# Altium PCB LM_001_Rev_C.PcbDoc (part 1 of 2)
Units mm, origin at the board's own origin, x right, y up, seen from the top; angles counter-clockwise.
Board outline 67 x 180 mm, 4 copper layers (Top Layer, +5V, Signal Layer 1, Bottom Layer), stack 0.778 mm thick; 103 components, 93 nets, 340 pads, 85 vias.
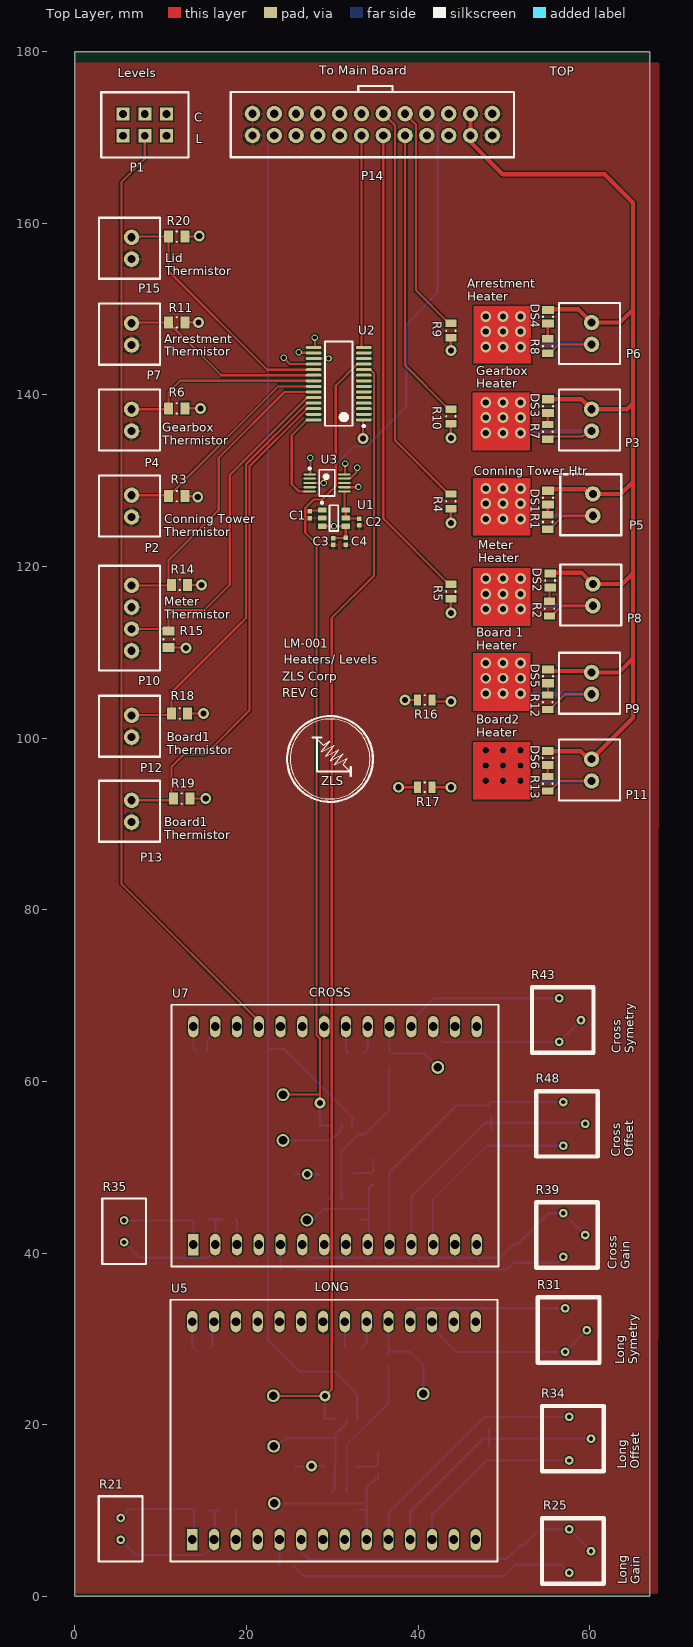
[diagram p0: Top Layer view]
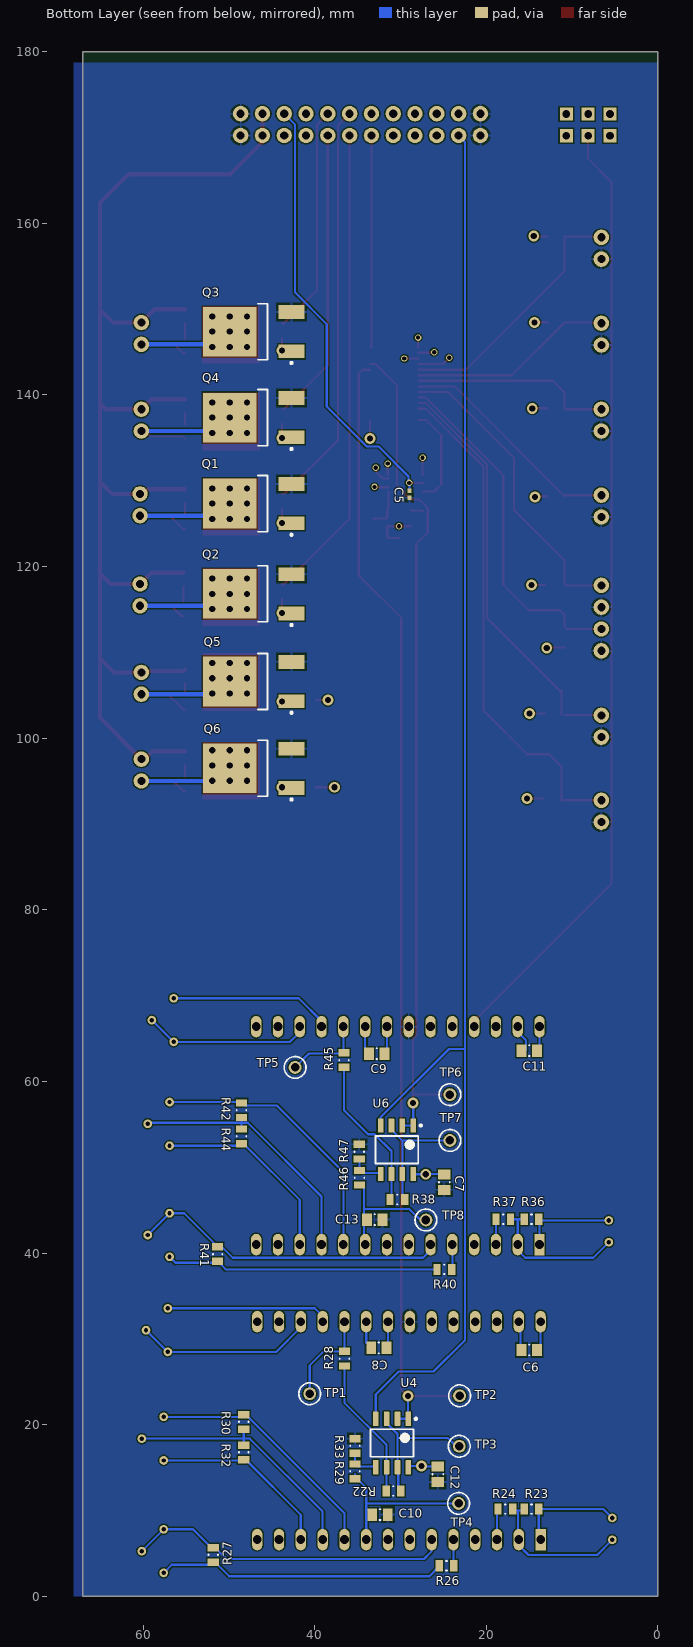
[diagram p1: Bottom Layer view, seen from below]
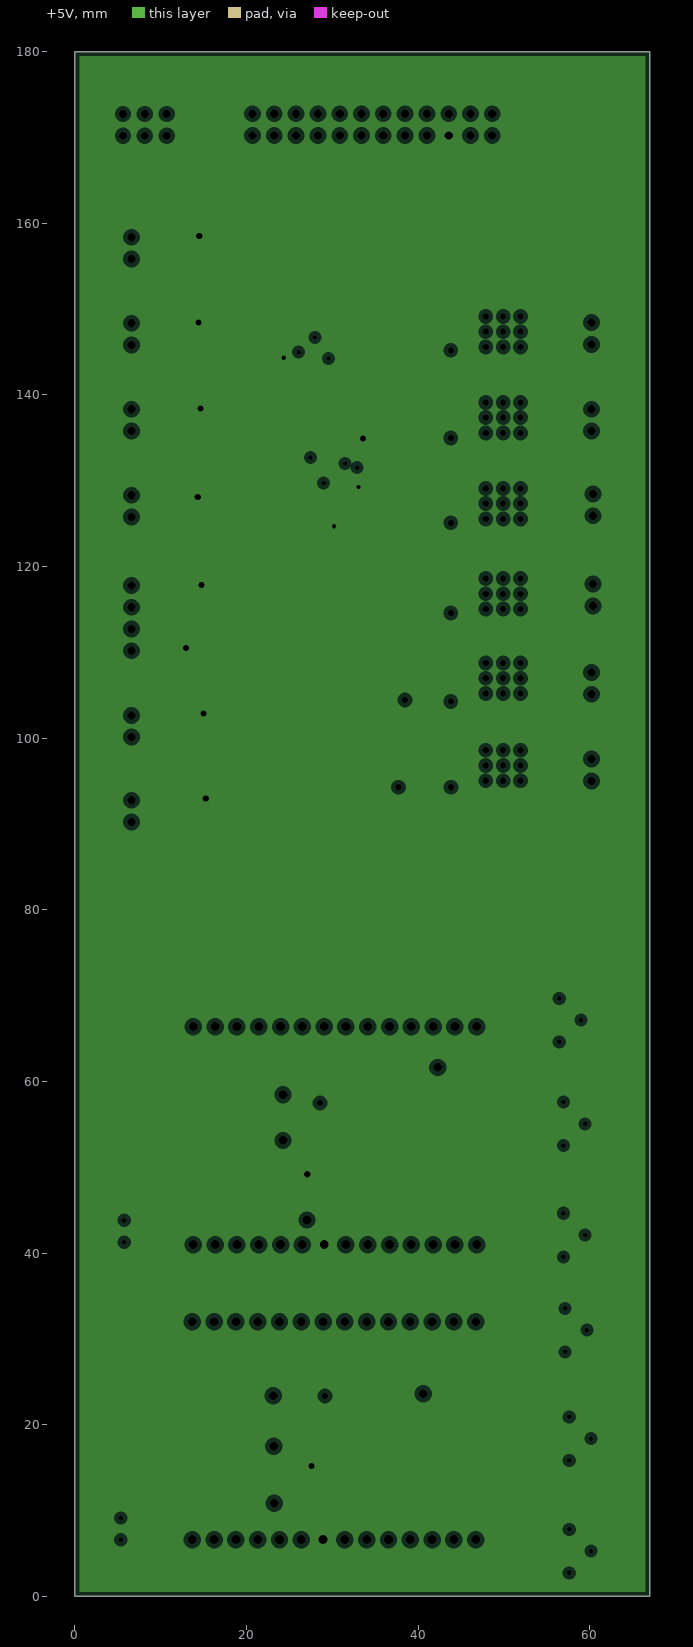
[diagram p2: +5V, clearances drawn from the general rule]
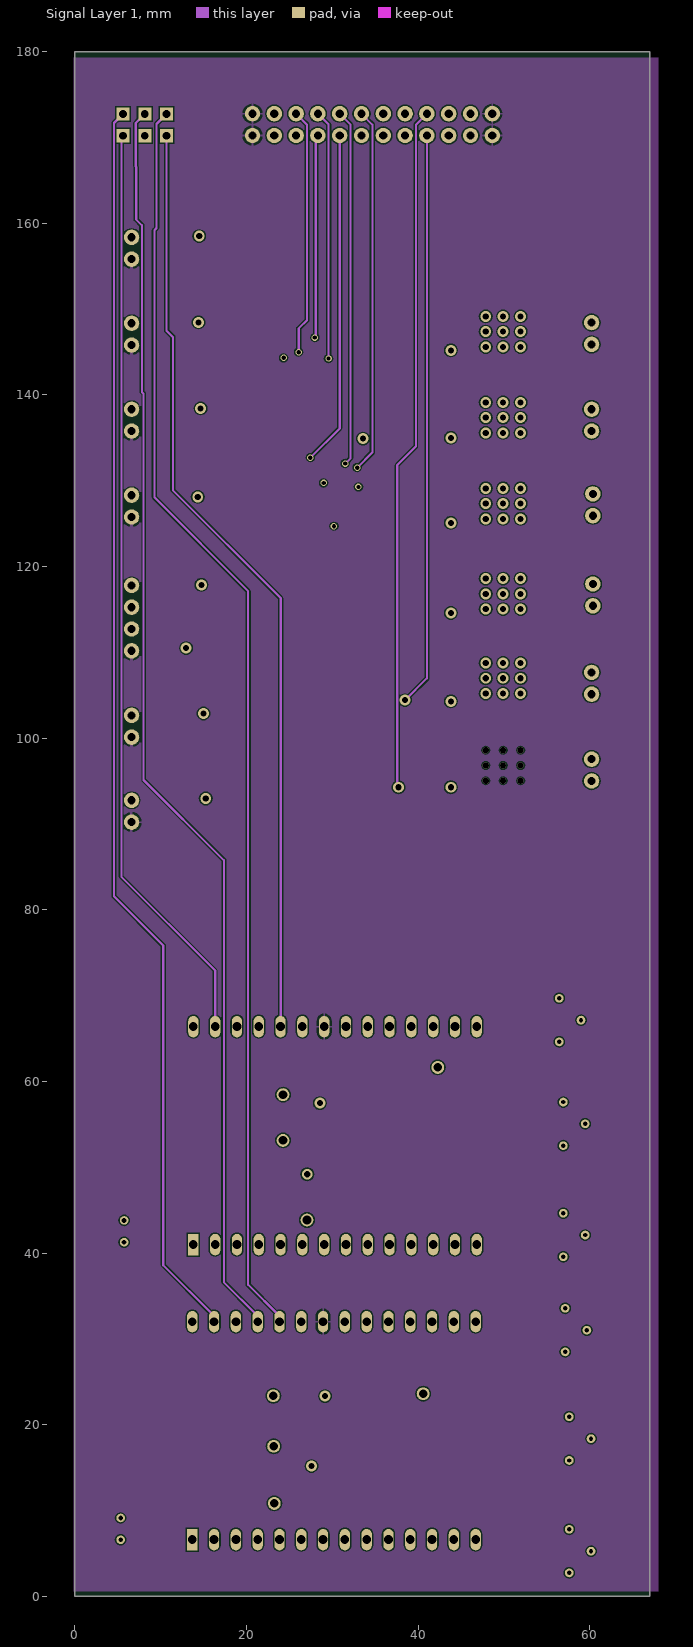
[diagram p3: Signal Layer 1]

## Layer stack, top to bottom
Top Solder: solder mask 0.0102, Solder Resist, Dk 3.5
Top Layer: signal copper 0.0356
Dielectric 1: core 0.254, FR-4, Dk 4.2
+5V: plane copper 0.036, net +5
Dielectric 4: prepreg 0.127, Dk 4.2
Signal Layer 1: signal copper 0.036
Dielectric 3: core 0.254, Dk 4.2
Bottom Layer: signal copper 0.0356
Bottom Solder: solder mask 0.0102, Solder Resist, Dk 3.5

## Board outline
0,180 67,180 67,0 0,0

## Design rules (kind name [scope] priority, off if disabled: settings)
Clearance [All] p1: gap=0.15 ignorepadtopadclearanceinfootprint=FALSE
ComponentClearance [All] p1: gap=0 collisioncheckmode=3 verticalgap=0.254 showdistances=TRUE
MinimumSolderMaskSliver [All] p1: minsoldermaskwidth=0.045
PlaneClearance [All] p1: clearance=0.508
PlaneConnect [All] p1: planeconnectstyle=Relief reliefexpansion=0.508 reliefentries=4 reliefconductorwidth=0.254 reliefairgap=0.254
PolygonConnect [All] p1: connectstyle=Relief reliefconductorwidth=0.254 reliefentries=4 polygonreliefangle="90 Angle" airgapwidth=0.254
RoutingVias [All] p1: holewidth=0.711 width=1.27 viastyle="Through Hole" minholewidth=0.711 minwidth=1.27 maxholewidth=0.711 maxwidth=1.27
SilkToSilkClearance [All] p1: silktosilkclearance=0.127
SilkToSolderMaskClearance [IsPad] p1: minsilkscreentomaskgap=0.127 clearancetoexposedcopper=TRUE
SolderMaskExpansion [All] p1: expansion=0.102
Width [All] p1: maxlimit=0.762 minlimit=0.254 preferedwidth=0.254
24 further rules are at their usual default settings.

## Classes and differential pairs
component class LM_001: C1 C2 C3 C4 C5 DS1 DS2 DS3 DS4 DS5 DS6 P1 P2 P3 P4 P5 P6 P7 P8 P9 P10 P11 P12 P13 P14 P15 Q1 Q2 Q3 Q4 Q5 Q6 R1 R2 R3 R4 R5 R6 R7 R8 R9 R10 R11 R12 R13 R14 R15 R16 R17 R18 R19 R20 U1 U2 U3
component class Signal_Conditioner: C6 C7 C8 C9 C10 C11 C12 C13 R21 R22 R23 R24 R25 R26 R27 R28 R29 R30 R31 R32 R33 R34 R35 R36 R37 R38 R39 R40 R41 R42 R43 R44 R45 R46 R47 R48 TP1 TP2 TP3 TP4 TP5 TP6 TP7 TP8 U4 U5 U6 U7

## Components (designator, comment, footprint, x,y, rotation, side; value= is the part's Value field where it differs from the comment)
C1 "0.1uF" CAPC0402(1005)60_L 27.368,126.036 r270 top
C2 "0.1uF" CAPC0402(1005)60_L 33.126,125.178 r90 top
C3 "0.1uF" CAPC0402(1005)60_L 30.093,122.904 r270 top
C4 "0.1uF" CAPC0402(1005)60_L 31.576,122.928 r270 top
C5 "0.1uF" CAPC0402(1005)60_L 28.951,128.403 r270 bottom
C6 "22uF" CAPC0805(2012)145_N 14.986,28.702 r0 bottom
C7 "CAP CER 0.1UF 25V X7R 0805" CAPC0805(2012)145_N 24.892,48.26 r270 bottom
C8 "CAP CER 0.1UF 25V X7R 0805" CAPC0805(2012)145_N 32.512,28.956 r0 bottom
C9 "CAP CER 0.1UF 25V X7R 0805" CAPC0805(2012)145_N 32.766,63.246 r0 bottom
C10 "22uF" CAPC0805(2012)145_N 32.385,9.525 r180 bottom
C11 "22uF" CAPC0805(2012)145_N 14.986,63.583 r0 bottom
C12 "CAP CER 0.1UF 25V X7R 0805" CAPC0805(2012)145_N 25.654,14.224 r270 bottom
C13 "22uF" CAPC0805(2012)145_N 33.007,43.901 r180 bottom
DS1 "LTST-S220KRKT" 0805C_L 55.118,128.016 r270 top
DS2 "LTST-S220KRKT" 0805C_L 55.372,118.364 r270 top
DS3 "LTST-S220KRKT" 0805C_L 55.118,138.684 r270 top
DS4 "LTST-S220KRKT" 0805C_L 55.118,149.098 r270 top
DS5 "LTST-S220KRKT" 0805C_L 55.118,107.188 r270 top
DS6 "LTST-S220KRKT" 0805C_L 55.098,97.684 r270 top
P1 "IPL1-103-01-L-D-K" IPL1-103-01-F-D 5.598,170.184 r0 top
P2 "IPL1-102-01-F-S-K" IPL1-102-01-F-S-K 6.598,127.034 r270 top
P3 "IPL1-102-01-F-S-K" IPL1-102-01-F-S-K 60.198,137.051 r270 top
P4 "IPL1-102-01-F-S-K" IPL1-102-01-F-S-K 6.598,137.051 r270 top
P5 "IPL1-102-01-F-S-K" IPL1-102-01-F-S-K 60.348,127.184 r270 top
P6 "IPL1-102-01-F-S-K" IPL1-102-01-F-S-K 60.198,147.149 r270 top
P7 "IPL1-102-01-F-S-K" IPL1-102-01-F-S-K 6.598,147.068 r270 top
P8 "IPL1-102-01-F-S-K" IPL1-102-01-F-S-K 60.348,116.684 r270 top
P9 "IPL1-102-01-F-S-K" IPL1-102-01-F-S-K 60.198,106.384 r270 top
P10 "IPL1-104-01-F-S-K-ND" IPL1-104-01-L-S-K 6.598,113.984 r270 top
P11 "IPL1-102-01-F-S-K" IPL1-102-01-F-S-K 60.198,96.277 r270 top
P12 "IPL1-102-01-F-S-K" IPL1-102-01-F-S-K 6.598,101.384 r270 top
P13 "IPL1-102-01-F-S-K" IPL1-102-01-F-S-K 6.598,91.484 r270 top
P14 "IPL1-112-01-L-D-K" IPL1-112-01-F-S-K 34.658,171.486 r0 top locked
P15 "IPL1-102-01-F-S-K" IPL1-102-01-F-S-K 6.598,157.084 r270 top
Q1 "NTD4804NT4G" ONSC-DPAK-3-369AA-01_V 47.098,127.322 r0 bottom
Q2 "NTD4804NT4G" ONSC-DPAK-3-369AA-01_V 47.098,116.812 r0 bottom
Q3 "NTD4804NT4G" ONSC-DPAK-3-369AA-01_V 47.098,147.356 r0 bottom
Q4 "NTD4804NT4G" ONSC-DPAK-3-369AA-01_V 47.098,137.339 r0 bottom
Q5 "NTD4804NT4G" ONSC-DPAK-3-369AA-01_V 47.098,106.591 r0 bottom
Q6 "NTD4804NT4G" ONSC-DPAK-3-369AA-01_V 47.098,96.484 r0 bottom
R1 "4.99K" RESC0805(2012)_L 55.098,125.184 r90 top
R2 "4.99K" RESC0805(2012)_L 55.298,115.084 r90 top
R3 "6.98K" RESC0805(2012)_N 11.848,128.184 r0 top
R4 "75" RESC0805(2012)_L 43.798,127.584 r270 top
R5 "75" RESC0805(2012)_L 43.798,117.084 r270 top
R6 "6.98K" RESC0805(2012)_N 11.848,138.434 r0 top
R7 "4.99K" RESC0805(2012)_L 55.098,135.684 r90 top
R8 "4.99K" RESC0805(2012)_L 55.098,145.684 r90 top
R9 "75" RESC0805(2012)_L 43.798,147.484 r270 top
R10 "75" RESC0805(2012)_L 43.798,137.484 r270 top
R11 "6.98K" RESC0805(2012)_N 11.848,148.434 r0 top
R12 "4.99K" RESC0805(2012)_L 55.098,104.184 r90 top
R13 "4.99K" RESC0805(2012)_L 55.098,94.684 r90 top
R14 "6.98K" RESC0805(2012)_N 12.192,117.856 r0 top
R15 "6.98K" RESC0805(2012)_N 10.922,111.506 r270 top
R16 "75" RESC0805(2012)_L 40.754,104.43 r0 top
R17 "75" RESC0805(2012)_L 40.754,94.27 r0 top
R18 "6.98K" RESC0805(2012)_N 12.192,102.87 r0 top
R19 "6.98K" RESC0805(2012)_N 12.446,92.964 r0 top
R20 "6.98K" RESC0805(2012)_N 11.848,158.434 r0 top
R21 "KTY81-120" KTY81-120 5.321,6.589 r90 top
R22 "10K" RESC0805(2012)_L 30.823,12.278 r180 bottom
R23 "1K" RESC0805(2012)_L 14.732,10.16 r180 bottom
R24 "10k" RESC0805(2012)_L 17.78,10.16 r0 bottom
R25 "100K" "Trimmer 2.54" 57.595,7.808 r270 top
R26 "24.3K" RESC0805(2012)_L 24.638,3.556 r180 bottom
R27 "DNP" RESC0805(2012)_L 51.816,4.826 r90 bottom
R28 "10K" RESC0805(2012)_L 36.538,27.696 r270 bottom
R29 "1.21k" RESC0805(2012)_L 35.293,14.564 r270 bottom
R30 "DNP" RESC0805(2012)_L 48.26,20.32 r90 bottom
R31 "100K" "Trimmer 2.54" 57.112,33.56 r270 top
R32 "DNP" RESC0805(2012)_L 48.26,16.764 r270 bottom
R33 "10K" RESC0805(2012)_L 35.306,17.526 r270 bottom
R34 "500K" "Trimmer 2.54" 57.595,20.914 r270 top
R35 "KTY81-120" KTY81-120 5.728,41.26 r90 top
R36 "1K" RESC0805(2012)_L 14.732,43.942 r180 bottom
R37 "10k" RESC0805(2012)_L 18.034,43.942 r0 bottom
R38 "10K" RESC0805(2012)_L 30.366,46.238 r180 bottom
R39 "100K" "Trimmer 2.54" 56.909,44.638 r270 top
R40 "24.3K" RESC0805(2012)_L 24.892,38.1 r180 bottom
R41 "DNP" RESC0805(2012)_L 51.308,39.878 r90 bottom
R42 "DNP" RESC0805(2012)_L 48.514,56.642 r90 bottom
R43 "100K" "Trimmer 2.54" 56.426,69.682 r270 top
R44 "DNP" RESC0805(2012)_L 48.514,53.594 r270 bottom
R45 "10k" RESC0805(2012)_L 36.576,62.484 r270 bottom
R46 "1.21k" RESC0805(2012)_L 34.785,48.778 r270 bottom
R47 "10K" RESC0805(2012)_L 34.798,51.816 r270 bottom
R48 "500K" "Trimmer 2.54" 56.909,57.592 r270 top
TP1 "DNP" KSTN-5003 40.577,23.607 r180 bottom
TP2 "DNP" KSTN-5003 23.114,23.368 r180 bottom
TP3 "DNP" KSTN-5003 23.152,17.485 r180 bottom
TP4 "DNP" KSTN-5003 23.228,10.831 r180 bottom
TP5 "DNP" KSTN-5003 42.278,61.631 r180 bottom
TP6 "DNP" KSTN-5003 24.244,58.456 r180 bottom
TP7 "DNP" KSTN-5003 24.244,53.122 r180 bottom
TP8 "DNP" KSTN-5003 27.038,43.851 r180 bottom
U1 "MAX6070AAUT41+T" SOT95P280X445-6N 30.168,125.636 r0 top
U2 "ADG1606BRUZ-REEL7" ADI-RU-28_M 30.734,141.307 r180 top
U3 "MAX11100EUB+T" U10+2_L 29.368,129.736 r0 top
U4 "LPC662AIM" D0008A_M 30.988,17.863 r270 bottom
U5 "SA40012" SA40012 13.673,6.609 r90 top
U6 "LPC662AIM" D0008A_M 30.417,52.029 r270 bottom
U7 "SA40012" SA40012 13.798,40.984 r90 top

## Footprints (in the part's own frame and the unit in brackets; to place one, negate y for a bottom-side part, rotate by r counter-clockwise, add the part's x,y. Pads: shape width x height; smd on the part's side, far side on the other; paste and mask are expansions set on the pad)
0805C_L [mm]
  rect 0.95x1.35 smd: 1(-0.8,0) 2(0.8,0)
  silkscreen extent -0.05,-0.57 0.05,0.58, body extent -1.1,-0.72 1.1,0.72, height 0.75
ADI-RU-28_M [mm] "SOP, 28-Leads, Body 9.7x4.4mm, Pitch 0.65mm, IPC Low Density"
  oval 1.85x0.35 smd: 1(-2.925,4.225) 2(-2.925,3.575) 3(-2.925,2.925) 4(-2.925,2.275) 5(-2.925,1.625) 6(-2.925,0.975) 7(-2.925,0.325) 8(-2.925,-0.325) 9(-2.925,-0.975) 10(-2.925,-1.625) 11(-2.925,-2.275) 12(-2.925,-2.925) 13(-2.925,-3.575) 14(-2.925,-4.225) 15(2.925,-4.225) 16(2.925,-3.575) 17(2.925,-2.925) 18(2.925,-2.275) 19(2.925,-1.625) 20(2.925,-0.975) 21(2.925,-0.325) 22(2.925,0.325) 23(2.925,0.975) 24(2.925,1.625) 25(2.925,2.275) 26(2.925,2.925) 27(2.925,3.575) 28(2.925,4.225)
  silkscreen extent -3.05,-4.9 1.6,5.07, body extent -2.25,-4.9 2.25,4.9, height 1.2
CAPC0402(1005)60_L [mm] "Chip Capacitor, Body 1.0x0.5mm, Height 0.6mm, IPC High Density"
  rect 0.52x0.52 smd: 1(-0.4,0) 2(0.4,0)
  body extent -0.55,-0.3 0.55,0.3, height 0.6
CAPC0805(2012)145_N [mm] "Chip Capacitor, Body 2.0x1.2mm, Height 1.45mm, IPC Medium Density"
  rect 1.15x1.45 smd: 1(-0.9,0) 2(0.9,0)
  silkscreen extent -0.05,-0.62 0.05,0.63, body extent -1.1,-0.72 1.1,0.73, height 1.45
D0008A_M [mm] "SOIC, 8-Leads, Body 5x4mm, Pitch 1.27mm, IPC Low Density"
  rrect15% 1.65x0.65 smd: 1(-2.825,1.905) 2(-2.825,0.635) 3(-2.825,-0.635) 4(-2.825,-1.905) 5(2.825,-1.905) 6(2.825,-0.635) 7(2.825,0.635) 8(2.825,1.905)
  silkscreen extent -2.95,-2.5 1.6,2.9, body extent -3,-2.45 3,2.45, height 1.63
IPL1-102-01-F-S-K [mm]
  round 1.8 hole 0.95: 1(-1.27,0) 2(1.27,0)
  silkscreen extent -3.56,-3.81 3.56,3.3, body extent -3.3,-3.56 3.3,3.05, height 8.13
IPL1-103-01-F-D [mil]
  rect 60x60 hole 35.43: 1(0,0) 2(0,100) 3(100,0) 4(100,100) 5(200,0) 6(200,100)
  silkscreen extent -100,-100 300,200, body extent -100,-100 280,210, height 320
IPL1-104-01-L-S-K [mm]
  round 1.8 hole 0.95: 1(-3.81,0) 2(-1.27,0) 3(1.27,0) 4(3.81,0)
  silkscreen extent -6.1,-3.81 6.1,3.3, body extent -5.84,-3.3 5.84,3.3, height 8.13
IPL1-112-01-F-S-K [mm]
  round 1.8 hole 0.95: 1(-13.97,-1.27) 2(-13.97,1.27) 3(-11.43,-1.27) 4(-11.43,1.27) 5(-8.89,-1.27) 6(-8.89,1.27) 7(-6.35,-1.27) 8(-6.35,1.27) 9(-3.81,-1.27) 10(-3.81,1.27) 11(-1.27,-1.27) 12(-1.27,1.27) 13(1.27,-1.27) 14(1.27,1.27) 15(3.81,-1.27) 16(3.81,1.27) 17(6.35,-1.27) 18(6.35,1.27) 19(8.89,-1.27) 20(8.89,1.27) 21(11.43,-1.27) 22(11.43,1.27) 23(13.97,-1.27) 24(13.97,1.27)
  silkscreen extent -16.51,-3.81 16.51,3.81, body extent -15.95,-4.32 16.05,3.56, height 8.13
KSTN-5003 [mm] "Test Point, Through Hole, Dia 2.54mm"
  round 1.5 hole 1: 1(0,0)
  silkscreen extent -1.27,-1.27 1.27,1.27, body extent -1.27,-1.27 1.27,1.27, height 4.57
KTY81-120 [mm] "THERMISTOR"
  round 1 hole 0.55: 1(0,0) 2(2.54,0)
  silkscreen extent -2.54,-2.54 5.08,2.54
ONSC-DPAK-3-369AA-01_V [mm] "DPAK, 3-Leads, Body 6.54x6.095mm, Pitch 2.29mm"
  rect 3x1.6 smd: 1(-4.4,2.29) 3(-4.4,-2.29)
  rect 6.2x5.8 smd: 4(2.8,0)
  silkscreen extent -4.52,-3.27 -0.45,3.76, body extent -1.6,-3.27 4.49,3.27, height 2.47
RESC0805(2012)_L [mm] "Chip Resistor, Body 2.0x1.3mm, IPC High Density"
  rect 0.85x1.3 smd: 1(-0.85,0) 2(0.85,0)
  silkscreen extent -0.05,-0.55 0.05,0.55, body extent -1.1,-0.67 1.1,0.68, height 0.7
RESC0805(2012)_N [mm] "Chip Resistor, Body 2.0x1.3mm, IPC Medium Density"
  rect 1.05x1.4 smd: 1(-0.95,0) 2(0.95,0)
  silkscreen extent -0.05,-0.6 0.05,0.6, body extent -1.1,-0.67 1.1,0.68, height 0.7
SA40012 [mm]
  rect 2.5x1.2 hole 1.016: 1(0,0)
  oval 2.5x1.2 hole 1.016: 2(0,-2.54) 3(0,-5.08) 4(0,-7.62) 5(0,-10.16) 6(0,-12.7) 7(0,-15.24) 8(0,-17.78) 9(0,-20.32) 10(0,-22.86) 11(0,-25.4) 12(0,-27.94) 13(0,-30.48) 14(0,-33.02) 15(25.4,-33.02) 16(25.4,-30.48) 17(25.4,-27.94) 18(25.4,-25.4) 19(25.4,-22.86) 20(25.4,-20.32) 21(25.4,-17.78) 22(25.4,-15.24) 23(25.4,-12.7) 24(25.4,-10.16) 25(25.4,-7.62) 26(25.4,-5.08) 27(25.4,-2.54) 28(25.4,0)
  silkscreen extent -2.54,-35.56 27.94,2.54
SOT95P280X445-6N [mm] "SOT23, 6-Leads, Body 2.90x2.80mm, Pitch 0.95mm, IPC Medium Density"
  rect 1x0.6 smd: 1(-1.375,0.95) 2(-1.375,0) 3(-1.375,-0.95) 4(1.375,-0.95) 5(1.375,0) 6(1.375,0.95)
  silkscreen extent -1.5,-1.5 0.5,1.92, body extent -2.11,-1.78 2.11,1.73, height 1.08
"Trimmer 2.54" [mil]
  round 40 hole 20: 1(0,0) 2(100,100) 3(200,0)
  silkscreen extent -50,-125 250,158, body extent -60,-126 260,200, height 175
U10+2_L [mm] "TSSOP, 10-Leads, Body 3x3mm, Pitch 0.5mm, IPC High Density"
  oval 1.45x0.25 smd: 1(-2.025,1) 2(-2.025,0.5) 3(-2.025,0) 4(-2.025,-0.5) 5(-2.025,-1) 6(2.025,-1) 7(2.025,-0.5) 8(2.025,0) 9(2.025,0.5) 10(2.025,1)
  silkscreen extent -2.15,-1.53 0.9,1.8, body extent -1.55,-1.55 1.55,1.55, height 1.1

## Part data
C1 C2 C3 C4 C5: library part CMP-1034-00252-1, "CAP CER 0.1UF 10V X7R 0402", Manufacturer="Murata Electronics North America", Manufacturer Part Number=GRM155R71A104KA01D, Operating Temperature="-55°C ~ 125°C", Package / Case="0402 (1005 Metric)", Ratings=-, Supplier Part Number 1=490-6321-1-ND, Temperature Coefficient=X7R, Tolerance=±10%, Voltage - Rated=10V, Applications="General Purpose", Category=Capacitors, ComponentLink1Description=http://www.murata.com/~/media/webrenewal/support/library/catalog/products/capacitor/mlcc/c02e.ashx?la=en-us, ComponentLink1URL=http://www.murata.com/~/media/webrenewal/support/library/catalog/products/capacitor/mlcc/c02e.ashx?la=en-us, Features=-, Height - Seated (Max)=-, Lead Spacing=-, Mounting Type="Surface Mount, MLCC", Packaging="Cut Tape (CT)", Part Status=Active, Pricing 1="1=0.1, 10=0.014, 100=0.0063, 500=0.00446, 1000=0.00351, 2500=0.00319, 5000=0.00293 (USD)", RoHS="RoHS Compliant", Size / Dimension="0.039\" L x 0.020\" W (1.00mm x 0.50mm)", Stock 1=2920395, Supplier 1=Digi-Key, Thickness (Max)="0.022\" (0.55mm)"
C6 C10 C11 C13: library part CMP-1036-04795-1, "CAP CER 22UF 16V X5R 0805", Manufacturer="Murata Electronics North America", Manufacturer Part Number=GRM219R61C226ME15L, Operating Temperature="-55°C ~ 85°C", Package / Case="0805 (2012 Metric)", Ratings=-, Supplier Part Number 1=490-9952-1-ND, Temperature Coefficient=X5R, Tolerance=±20%, Voltage - Rated=16V, Applications="General Purpose", Category=Capacitors, ComponentLink1Description=http://search.murata.co.jp/Ceramy/image/img/A01X/G101/ENG/GRM219R61C226ME15-01.pdf, ComponentLink1URL=http://search.murata.co.jp/Ceramy/image/img/A01X/G101/ENG/GRM219R61C226ME15-01.pdf, Features=-, Height - Seated (Max)=-, Lead Spacing=-, Lead Style=-, Mounting Type="Surface Mount, MLCC", Notification="Current market demand for these product types have resulted in fluctuating and extending lead times. Lead times may differ.", Packaging="Cut Tape (CT)", Part Status=Active, Pricing 1="1=0.51, 10=0.359, 100=0.2364, 500=0.1751, 1000=0.14884 (USD)", RoHS="RoHS Compliant", Size / Dimension="0.079\" L x 0.049\" W (2.00mm x 1.25mm)", Stock 1=200, Supplier 1=Digi-Key, Thickness (Max)="0.039\" (1.00mm)"
C7 C8 C9 C12: library part CMP-1036-04795-1, Capacitance=0.1µF, Manufacturer="Murata Electronics North America", Manufacturer Part Number=GRM21BR71E104KA01L, Operating Temperature="-55°C ~ 125°C", Package / Case="0805 (2012 Metric)", Ratings=-, Supplier Part Number 1=490-1673-6-ND, Temperature Coefficient=X7R, Tolerance=±10%, Voltage - Rated=25V, Applications="General Purpose", Category=Capacitors, ComponentLink1Description=http://www.murata.com/~/media/webrenewal/support/library/catalog/products/capacitor/mlcc/c02e.ashx, ComponentLink1URL=http://www.murata.com/~/media/webrenewal/support/library/catalog/products/capacitor/mlcc/c02e.ashx, Features=-, Height - Seated (Max)=-, Lead Spacing=-, Lead Style=-, Mounting Type="Surface Mount, MLCC", Packaging=Digi-Reel®, Part Status=Active, Pricing 1="1=0.2, 10=0.145, 100=0.0683, 500=0.04788, 1000=0.03964 (USD)", RoHS="RoHS Compliant", Size / Dimension="0.079\" L x 0.049\" W (2.00mm x 1.25mm)", Stock 1=891652, Supplier 1=Digi-Key, Thickness (Max)="0.053\" (1.35mm)"
DS1 DS2 DS3 DS4 DS5 DS6: library part "LED A/K", "LED RED CLEAR CHIP SMD R/A", Case/Package=0805, Case Code (Metric)=2012, Colour=Red, Forward Current=20mA, Forward Voltage=2V, Lens Colour=Colorless, Manufacturer="Vishay / Lite-On", Max Operating Temperature=85°C, Min Operating Temperature=-55°C, Package Quantity=4000, Power Dissipation=75mW, Supplier Part Number 1=160-1469-1-ND, Case Code (Imperial)=0805, ComponentLink1Description=https://datasheet.ciiva.com/2110/s-110-ltst-s220krkt-2110132.pdf, ComponentLink1URL=https://datasheet.ciiva.com/2110/s-110-ltst-s220krkt-2110132.pdf, ComponentLink2Description=https://datasheet.ciiva.com/2110/s-110-ltst-s220krkt-2110133.pdf, ComponentLink2URL=https://datasheet.ciiva.com/2110/s-110-ltst-s220krkt-2110133.pdf, ComponentLink3Description=https://datasheet.ciiva.com/2110/s-110-ltst-s220krkt-2110134.pdf, ComponentLink3URL=https://datasheet.ciiva.com/2110/s-110-ltst-s220krkt-2110134.pdf, ComponentLink4Description=https://datasheet.ciiva.com/12403/lite-on-ltst-s220krkt-187389-12403798.pdf, ComponentLink4URL=https://datasheet.ciiva.com/12403/lite-on-ltst-s220krkt-187389-12403798.pdf, ComponentLink5Description=https://datasheet.ciiva.com/16345/lite-onltst-s220krkt-16345511.pdf, ComponentLink5URL=https://datasheet.ciiva.com/16345/lite-onltst-s220krkt-16345511.pdf, ComponentLink6Description=https://datasheet.ciiva.com/15118/getdatasheetpartid-225752-15118120.pdf, ComponentLink6URL=https://datasheet.ciiva.com/15118/getdatasheetpartid-225752-15118120.pdf, ComponentLink7Description=https://datasheet.ciiva.com/14633/0900766b80dc0b76-14633737.pdf, ComponentLink7URL=https://datasheet.ciiva.com/14633/0900766b80dc0b76-14633737.pdf, ComponentLink8Description=https://datasheet.ciiva.com/11775/0900766b80dc0b76-11775439.pdf, ComponentLink8URL=https://datasheet.ciiva.com/11775/0900766b80dc0b76-11775439.pdf, Depth=0.6mm, Dominant Wavelength=631nm, Height=0.6mm, Illumination Colour=Red, Lead Free="Lead Free", Length=2.1mm, Lens Style=Diffused,Colorless, Lens Transparency=Clear, Luminous Intensity=54mcd, Manufacturer Part Number=LTST-S220KRKT, Mount="Surface Mount", Number of Elements=1, Number of LEDs=1, Number of Pins=2, Packaging="Tape and Reel", Power Rating=75mW, Pricing 1="1=0.31, 10=0.225, 25=0.1656, 100=0.1183, 250=0.0804, 500=0.071, 1000=0.0556 (USD)", Radiation Hardening=No, Stock 1=108191, Supplier 1=Digi-Key, Test Current=20mA, Viewing Angle=130°, Wavelength=639nm, Width=1mm
P1: library part IPL1-103-01-F-D, ".100 TERMINAL ASSY", Current Rating=-, Insulation Color=Natural, Manufacturer="Samtec Inc.", Material Flammability Rating="UL94 V-0", Operating Temperature="-55°C ~ 125°C", Supplier Part Number 1=SAM9594-ND, Voltage Rating="675VAC, 954VDC", Applications=-, Category="Connectors, Interconnects", ComponentLink1Description=http://suddendocs.samtec.com/prints/ipl1-1xx-xx-xxx-d-xx-x-xx-mkt.pdf, ComponentLink1URL=http://suddendocs.samtec.com/prints/ipl1-1xx-xx-xxx-d-xx-x-xx-mkt.pdf, Connector Type=Header, Contact Finish - Mating=Gold, Contact Finish - Post=Tin, Contact Finish Thickness - Mating="10.0µin (0.25µm)", Contact Finish Thickness - Post=-, Contact Length - Mating="0.215\" (5.46mm)", Contact Length - Post="0.120\" (3.05mm)", Contact Material="Phosphor Bronze", Contact Shape=Square, Contact Type="Male Pin", Fastening Type="Locking Ramp", Features=-, Ingress Protection=-, Insulation Height="0.320\" (8.13mm)", Insulation Material="Liquid Crystal Polymer (LCP)", Manufacturer Part Number=IPL1-103-01-L-D-K, Mated Stacking Heights=-, Mounting Type="Through Hole", Number of Positions=6, Number of Positions Loaded=All, Number of Rows=2, Overall Contact Length=-, Packaging=Tube, Part Status=Active, Pitch - Mating="0.100\" (2.54mm)", Pricing 1="1=2.6, 63=2.18397, 126=2.08, 504=1.768, 1008=1.508, 5040=1.352 (USD)", RoHS="RoHS Compliant", Row Spacing - Mating="0.100\" (2.54mm)", Shrouding="Shrouded - 4 Wall", Stock 1=281, Style="Board to Cable/Wire", Supplier 1=Digi-Key, Termination=Solder
P2 P3 P4 P5 P6 P7 P8 P9 P11 P12 P13 P15: ".100 TERMINAL ASSEMBLY", Current Rating=-, Insulation Color=Natural, Manufacturer="Samtec Inc.", Material Flammability Rating="UL94 V-0", Operating Temperature="-55°C ~ 125°C", Supplier Part Number 1=IPL1-102-01-F-S-K-ND, Voltage Rating="675VAC, 954VDC", Applications=-, Category="Connectors, Interconnects", ComponentLink1Description=http://suddendocs.samtec.com/prints/ipl1-1xx-xx-xxx-s-xx-x-xx-mkt.pdf, ComponentLink1URL=http://suddendocs.samtec.com/prints/ipl1-1xx-xx-xxx-s-xx-x-xx-mkt.pdf, Connector Type=Header, Contact Finish - Mating=Gold, Contact Finish - Post=Tin, Contact Finish Thickness - Mating="3µin (0.08µm)", Contact Finish Thickness - Post=-, Contact Length - Mating="0.215\" (5.46mm)", Contact Length - Post="0.120\" (3.05mm)", Contact Material="Phosphor Bronze", Contact Shape=Square, Contact Type="Male Pin", Fastening Type="Locking Ramp", Features=-, Ingress Protection=-, Insulation Height="0.320\" (8.13mm)", Insulation Material="Liquid Crystal Polymer (LCP)", Manufacturer Part Number=IPL1-102-01-F-S-K, Mated Stacking Heights=-, Mounting Type="Through Hole", Number of Positions=2, Number of Positions Loaded=All, Number of Rows=1, Overall Contact Length=-, Packaging=Tube, Part Status=Active, Pitch - Mating="0.100\" (2.54mm)", Pricing 1="1=1.69 (USD)", RoHS="RoHS Compliant", Row Spacing - Mating=-, Shrouding="Shrouded - 4 Wall", Stock 1=0, Style="Board to Cable/Wire", Supplier 1=Digi-Key, Termination=Solder
P10: library part "Header 4", ".100 TERMINAL ASSEMBLY", Manufacturer="Samtec Inc.", Manufacturer Part Number=IPL1-104-01-F-S-K, Category="Connectors, Interconnects", Part Status=Active, Pricing 1="1=1.87 (USD)", RoHS="RoHS Compliant", Stock 1=0, Supplier 1=Digi-Key, Supplier Part Number 1=IPL1-104-01-F-S-K-ND
P14: library part IPL1-112-01-F-S-K, Current Rating=-, Insulation Color=Natural, Manufacturer="Samtec Inc.", Material Flammability Rating="UL94 V-0", Operating Temperature="-55°C ~ 125°C", Supplier Part Number 1=SAM10587-ND, Voltage Rating="675VAC, 954VDC", Applications=-, Category="Connectors, Interconnects", ComponentLink1Description=http://suddendocs.samtec.com/prints/ipl1-1xx-xx-xxx-d-xx-x-xx-mkt.pdf, ComponentLink1URL=http://suddendocs.samtec.com/prints/ipl1-1xx-xx-xxx-d-xx-x-xx-mkt.pdf, Connector Type=Header, Contact Finish - Mating=Gold, Contact Finish - Post=Tin, Contact Finish Thickness - Mating="10.0µin (0.25µm)", Contact Finish Thickness - Post=-, Contact Length - Mating="0.215\" (5.46mm)", Contact Length - Post="0.120\" (3.05mm)", Contact Material="Phosphor Bronze", Contact Shape=Square, Contact Type="Male Pin", Fastening Type="Locking Ramp", Features=-, Ingress Protection=-, Insulation Height="0.320\" (8.13mm)", Insulation Material="Liquid Crystal Polymer (LCP)", Manufacturer Part Number=IPL1-112-01-L-D-K, Mated Stacking Heights=-, Mounting Type="Through Hole", Number of Positions=24, Number of Positions Loaded=All, Number of Rows=2, Overall Contact Length=-, Packaging=Tube, Part Status=Active, Pitch - Mating="0.100\" (2.54mm)", Pricing 1="1=3.8, 18=3.64778, 108=3.04, 504=2.58401, 1008=2.204, 5004=1.976 (USD)", RoHS="RoHS Compliant", Row Spacing - Mating="0.100\" (2.54mm)", Shrouding="Shrouded - 4 Wall", Stock 1=142, Style="Board to Cable/Wire", Supplier 1=Digi-Key, Termination=Solder
Q1 Q2 Q3 Q4 Q5 Q6: library part CMP-1058-00341-1, "Power MOSFET, 30 V, 117 A, Single N-Channel, 3-Pin DPAK, Pb-Free, Tape and Reel", Manufacturer="On Semiconductor", Package Type=DPAK-3, Supplier Part Number 1=NTD4804NT4GOSDKR-ND, Channel Polarity="N Channel", Ciss Typ (pF)=4490, ComponentLink1Description="Manufacturer URL", ComponentLink1URL=http://www.onsemi.com/, ComponentLink2Description=Datasheet, ComponentLink2URL=http://www.onsemi.cn/pub_link/Collateral/NTD4804N-D.PDF, ComponentLink3Description="Package Specification", ComponentLink3URL=http://www.onsemi.cn/pub_link/Collateral/369AA.PDF, Configuration=Single, Coss Typ (pF)=952, Crss Typ (pF)=556, DatasheetVersion="Rev. 8", ID Max (A)=117, Mounting Technology="Surface Mount", PackageDescription="3-Pin Flange Mount, Body 6.54 x 6.095 mm, Pitch 2.29 mm", PackageReference=DPAK-3-369AA-01, PackageVersion="Rev. B, 06/2010", Packing="Tape and Reel", PartNumber=NTD4804NT4G, Qrr Typ (nC)=30, RoHS=Pb-Free, Supplier 1=Digi-Key, V(BR)DSS Min (V)=30, VGS(th) Max (V)=2.5, VGS Max (V)=20
R1 R2 R7 R8 R12 R13: library part CMP-1013-00393-1, "RES SMD 4.99K OHM 1% 1/8W 0805", Manufacturer="Vishay Dale", Manufacturer Part Number=CRCW08054K99FKEA, Operating Temperature="-55°C ~ 155°C", Package / Case="0805 (2012 Metric)", Power (Watts)="0.125W, 1/8W", Resistance (Ohms)=4.99k, Supplier Device Package=0805, Supplier Part Number 1=541-4.99KCCT-ND, Temperature Coefficient=±100ppm/°C, Tolerance=±1%, Category=Resistors, ComponentLink1Description=http://www.vishay.com/docs/20035/dcrcwe3.pdf, ComponentLink1URL=http://www.vishay.com/docs/20035/dcrcwe3.pdf, Composition="Thick Film", Failure Rate=-, Features="Automotive AEC-Q200", Height - Seated (Max)="0.020\" (0.50mm)", Packaging="Cut Tape (CT)", Part Status=Active, Pricing 1="1=0.1, 10=0.044, 100=0.0178, 1000=0.00802, 2500=0.00696 (USD)", RoHS="RoHS Compliant", Size / Dimension="0.079\" L x 0.049\" W (2.00mm x 1.25mm)", Stock 1=93740, Supplier 1=Digi-Key
R3 R6 R11 R14 R15 R18 R19 R20: library part CMP-1013-00606-1, "RES SMD 6.98K OHM 1% 1/8W 0805", Manufacturer="Vishay Dale", Manufacturer Part Number=CRCW08056K98FKEA, Operating Temperature="-55°C ~ 155°C", Package / Case="0805 (2012 Metric)", Power (Watts)="0.125W, 1/8W", Supplier Device Package=0805, Supplier Part Number 1=541-6.98KCCT-ND, Temperature Coefficient=±100ppm/°C, Tolerance=±1%, Category=Resistors, ComponentLink1Description=http://www.vishay.com/docs/20035/dcrcwe3.pdf, ComponentLink1URL=http://www.vishay.com/docs/20035/dcrcwe3.pdf, Composition="Thick Film", Failure Rate=-, Features="Automotive AEC-Q200", Height - Seated (Max)="0.020\" (0.50mm)", Packaging="Cut Tape (CT)", Part Status=Active, Pricing 1="1=0.1, 10=0.055, 100=0.0223, 1000=0.01003, 2500=0.0087 (USD)", RoHS="RoHS Compliant", Size / Dimension="0.079\" L x 0.049\" W (2.00mm x 1.25mm)", Stock 1=573, Supplier 1=Digi-Key
R4 R5 R9 R10 R16 R17: library part CMP-1013-00393-1, "RES SMD 75 OHM 1% 1/8W 0805", Manufacturer="Vishay Dale", Manufacturer Part Number=CRCW080575R0FKTA, Operating Temperature="-55°C ~ 155°C", Package / Case="0805 (2012 Metric)", Power (Watts)="0.125W, 1/8W", Supplier Device Package=0805, Supplier Part Number 1=541-3031-1-ND, Temperature Coefficient=±100ppm/°C, Tolerance=±1%, Category=Resistors, ComponentLink1Description=http://www.vishay.com/docs/20008/dcrcw.pdf, ComponentLink1URL=http://www.vishay.com/docs/20008/dcrcw.pdf, Composition="Thick Film", Failure Rate=-, Features="Automotive AEC-Q200", Height - Seated (Max)="0.020\" (0.50mm)", Packaging="Cut Tape (CT)", Part Status=Active, Pricing 1="1=0.16, 10=0.142, 100=0.0546, 1000=0.02401, 2500=0.02073 (USD)", RoHS="RoHS non-compliant", Size / Dimension="0.079\" L x 0.049\" W (2.00mm x 1.25mm)", Stock 1=1088, Supplier 1=Digi-Key
R21 R35: "THERMISTOR PTC 1K OHM PBCYT2", Manufacturer="NXP USA Inc.", Manufacturer Part Number=KTY81/120,112, Operating Temperature="-55°C ~ 150°C", Package / Case="TO-226-2, TO-92-2 (TO-226AC)", Resistance Tolerance=-, Supplier Device Package=PBCYT2, Supplier Part Number 1=568-12506-ND, Category="Sensors, Transducers", ComponentLink1Description=http://www.nxp.com/documents/data_sheet/KTY81_SER.pdf, ComponentLink1URL=http://www.nxp.com/documents/data_sheet/KTY81_SER.pdf, Mounting Type="Through Hole", Packaging=Bulk, Part Status=Active, Pricing 1="1=1.11, 5=1.068, 10=0.868, 25=0.748, 50=0.648, 100=0.5878, 500=0.49432, 1000=0.44088, 5000=0.4008 (USD)", RoHS="RoHS Compliant", Stock 1=2002, Supplier 1=Digi-Key
R22 R24 R27 R28 R33 R37 R38 R41 R45 R47: library part CMP-1013-00393-1, "RES SMD 10K OHM 1% 1/8W 0805", Manufacturer="Vishay Dale", Manufacturer Part Number=CRCW080510K0FKEA, Operating Temperature="-55°C ~ 155°C", Package / Case="0805 (2012 Metric)", Power (Watts)="0.125W, 1/8W", Supplier Device Package=0805, Supplier Part Number 1=541-10.0KCCT-ND, Temperature Coefficient=±100ppm/°C, Tolerance=±1%, Category=Resistors, ComponentLink1Description=http://www.vishay.com/docs/20035/dcrcwe3.pdf, ComponentLink1URL=http://www.vishay.com/docs/20035/dcrcwe3.pdf, Composition="Thick Film", Failure Rate=-, Features="Automotive AEC-Q200", Height - Seated (Max)="0.020\" (0.50mm)", Packaging="Cut Tape (CT)", Part Status=Active, Pricing 1="1=0.1, 10=0.055, 100=0.0223, 1000=0.01003, 2500=0.0087 (USD)", RoHS="RoHS Compliant", Size / Dimension="0.079\" L x 0.049\" W (2.00mm x 1.25mm)", Stock 1=1858038, Supplier 1=Digi-Key
R23 R36: library part CMP-1013-00393-1, "RES SMD 1K OHM 1% 1/8W 0805", Manufacturer="Vishay Dale", Manufacturer Part Number=CRCW08051K00FKEA, Operating Temperature="-55°C ~ 155°C", Package / Case="0805 (2012 Metric)", Power (Watts)="0.125W, 1/8W", Supplier Device Package=0805, Supplier Part Number 1=541-1.00KCCT-ND, Temperature Coefficient=±100ppm/°C, Tolerance=±1%, Category=Resistors, ComponentLink1Description=http://www.vishay.com/docs/20035/dcrcwe3.pdf, ComponentLink1URL=http://www.vishay.com/docs/20035/dcrcwe3.pdf, Composition="Thick Film", Failure Rate=-, Features="Automotive AEC-Q200", Height - Seated (Max)="0.020\" (0.50mm)", Packaging="Cut Tape (CT)", Part Status=Active, Pricing 1="1=0.1, 10=0.055, 100=0.0223, 1000=0.01003, 2500=0.0087 (USD)", RoHS="RoHS Compliant", Size / Dimension="0.079\" L x 0.049\" W (2.00mm x 1.25mm)", Stock 1=157631, Supplier 1=Digi-Key
R25 R31 R39 R43: library part Trimmer, "TRIMMER 5K OHM 0.25W PC PIN", Manufacturer="Bourns Inc.", Manufacturer Part Number=3296Y-1-104LF, Power (Watts)="0.5W, 1/2W", Resistive Material=Cermet, Supplier Part Number 1=3296Y-104LF-ND, Temperature Coefficient=±100ppm/°C, Tolerance=±10%, Adjustment Type="Top Adjustment", Category="Potentiometers, Variable Resistors", ComponentLink1Description=https://www.bourns.com/docs/Product-Datasheets/3296.pdf, ComponentLink1URL=https://www.bourns.com/docs/Product-Datasheets/3296.pdf, Mounting Type="Through Hole", Packaging=Tube, Part Status=Active, Pricing 1="1=2.41, 10=2.117, 25=1.898, 50=1.825, 100=1.752, 250=1.679, 500=1.387, 1000=1.314, 5000=1.095 (USD)", RoHS="RoHS Compliant", Size / Dimension="Rectangular - 0.375\" x 0.190\" Face x 0.395\" H (9.53mm x 4.83mm x 10.03mm)", Stock 1=10872, Supplier 1=Digi-Key, Termination Style="PC Pins"
R26 R40: library part CMP-1013-00393-1, "RES SMD 24.3K OHM 1% 1/8W 0805", Manufacturer="Vishay Dale", Manufacturer Part Number=CRCW080524K3FKEA, Operating Temperature="-55°C ~ 155°C", Package / Case="0805 (2012 Metric)", Power (Watts)="0.125W, 1/8W", Supplier Device Package=0805, Supplier Part Number 1=541-24.3KCCT-ND, Temperature Coefficient=±100ppm/°C, Tolerance=±1%, Category=Resistors, ComponentLink1Description=http://www.vishay.com/docs/20035/dcrcwe3.pdf, ComponentLink1URL=http://www.vishay.com/docs/20035/dcrcwe3.pdf, Composition="Thick Film", Failure Rate=-, Features="Automotive AEC-Q200", Height - Seated (Max)="0.020\" (0.50mm)", Packaging="Cut Tape (CT)", Part Status=Active, Pricing 1="1=0.1, 10=0.055, 100=0.0223, 1000=0.01003, 2500=0.0087 (USD)", RoHS="RoHS Compliant", Size / Dimension="0.079\" L x 0.049\" W (2.00mm x 1.25mm)", Stock 1=35, Supplier 1=Digi-Key
R29 R46: library part CMP-1013-00393-1, "RES SMD 1.21K OHM 1% 1/8W 0805", Manufacturer="Vishay Dale", Manufacturer Part Number=CRCW08051K21FKEA, Operating Temperature="-55°C ~ 155°C", Package / Case="0805 (2012 Metric)", Power (Watts)="0.125W, 1/8W", Supplier Device Package=0805, Supplier Part Number 1=541-1.21KCCT-ND, Temperature Coefficient=±100ppm/°C, Tolerance=±1%, Category=Resistors, ComponentLink1Description=http://www.vishay.com/docs/20035/dcrcwe3.pdf, ComponentLink1URL=http://www.vishay.com/docs/20035/dcrcwe3.pdf, Composition="Thick Film", Failure Rate=-, Features="Automotive AEC-Q200", Height - Seated (Max)="0.020\" (0.50mm)", Packaging="Cut Tape (CT)", Part Status=Active, Pricing 1="1=0.1, 10=0.055, 100=0.0223, 1000=0.01003, 2500=0.0087 (USD)", RoHS="RoHS Compliant", Size / Dimension="0.079\" L x 0.049\" W (2.00mm x 1.25mm)", Stock 1=93438, Supplier 1=Digi-Key
R30 R32 R42 R44: library part CMP-1013-00393-1, "RES SMD 249K OHM 1% 1/8W 0805", Manufacturer="Vishay Dale", Manufacturer Part Number=CRCW0805249KFKECC, Operating Temperature="-55°C ~ 155°C", Package / Case="0805 (2012 Metric)", Power (Watts)="0.125W, 1/8W", Supplier Device Package=0805, Supplier Part Number 1=541-4128-1-ND, Temperature Coefficient=±100ppm/°C, Tolerance=±1%, Category=Resistors, ComponentLink1Description=http://www.vishay.com/docs/28773/crcwce3.pdf, ComponentLink1URL=http://www.vishay.com/docs/28773/crcwce3.pdf, Composition="Thick Film", Failure Rate=-, Features=-, Height - Seated (Max)="0.024\" (0.60mm)", Packaging="Cut Tape (CT)", Part Status=Active, Pricing 1="1=0.1, 10=0.06, 100=0.0244, 1000=0.01094, 2500=0.0095, 5000=0.00785 (USD)", RoHS="RoHS Compliant", Size / Dimension="0.079\" L x 0.049\" W (2.00mm x 1.25mm)", Stock 1=19464, Supplier 1=Digi-Key
R34 R48: library part Trimmer, "TRIMMER 500K OHM 0.5W PC PIN TOP", Manufacturer="Bourns Inc.", Manufacturer Part Number=3296Y-1-504LF, Power (Watts)="0.5W, 1/2W", Resistive Material=Cermet, Supplier Part Number 1=3296Y-504LF-ND, Temperature Coefficient=±100ppm/°C, Tolerance=±10%, Adjustment Type="Top Adjustment", Category="Potentiometers, Variable Resistors", ComponentLink1Description=https://www.bourns.com/docs/Product-Datasheets/3296.pdf, ComponentLink1URL=https://www.bourns.com/docs/Product-Datasheets/3296.pdf, Mounting Type="Through Hole", Packaging=Tube, Part Status=Active, Pricing 1="1=2.41, 10=2.117, 25=1.898, 50=1.825, 100=1.752, 300=1.679, 500=1.387, 1000=1.314, 5000=1.095 (USD)", RoHS="RoHS Compliant", Size / Dimension="Rectangular - 0.375\" x 0.190\" Face x 0.395\" H (9.53mm x 4.83mm x 10.03mm)", Stock 1=2109, Supplier 1=Digi-Key, Termination Style="PC Pins"
TP1 TP2 TP3 TP4 TP5 TP6 TP7 TP8: library part CMP-1672-00009-1, "Test Point, Orange, 1-Pin THD, RoHS", Colour=Orange,White, Flammability Rating="UL94 V-0", Forward Current="3 A", Forward Voltage="1.08 V", Manufacturer="Keystone Electronics", Manufacturer Part Number=5003, Max Operating Temperature="150 degC", Max Surge Current="80 A", Min Operating Temperature="-65 degC", Package Quantity=500, Peak Reverse Current="600 uA", Supplier Part Number 1=1432640, Body Material=PBT, ComponentLink1Description="Manufacturer URL", ComponentLink1URL=http://www.keyelco.com/, ComponentLink2Description=Datasheet, ComponentLink2URL=http://keyelco.com/userAssets/file/M65p56.pdf, Contact Material=Bronze, Contact Plating=Silver,Tin, DatasheetVersion=Jun-15, Diameter="5.3 mm", Height="0.25 inch", Inside Diameter=1.27mm, Lead Free="Lead Free", Length="9.5 mm", Material=Bronze,Nylon,Silver, Mount="Through Hole", Number of Pins=1, Outside Diameter=2.54mm, PackageDescription="1-Pin Through Hole Device, Dia 2.54 mm", PackageReference=5003, Packaging=Bulk, Pins=2, Plating=Silver, Pricing 1="100=0.176, 500=0.148, 1000=0.146, 2000=0.143, 4000=0.141 (USD)", Radiation Hardening=No, REACH SVHC="No SVHC", RoHSCompliant=true, Stock 1=5752, Supplier 1="Future Electronics", Termination="Through Hole", Weight="0.01 lb", Width="0.25 inch"
U1: "IC VREF SERIES 4.096V SOT23", Current - Supply=350µA, Manufacturer="Maxim Integrated", Operating Temperature="-40°C ~ 125°C (TA)", Package / Case=SOT-23-6, Supplier Part Number 1=MAX6070AAUT41+TCT-ND, Temperature Coefficient=6ppm/°C, Tolerance=±0.04%, Voltage - Input="4.3 V ~ 5.5 V", Voltage - Output (Min/Fixed)=4.096V, Category="Integrated Circuits (ICs)", ComponentLink1Description=https://datasheets.maximintegrated.com/en/ds/MAX6070-MAX6071.pdf, ComponentLink1URL=https://datasheets.maximintegrated.com/en/ds/MAX6070-MAX6071.pdf, Manufacturer Part Number=MAX6070AAUT41+T, Mounting Type="Surface Mount", Noise - 0.1Hz to 10Hz=9.6µVp-p, Noise - 10Hz to 10kHz=9µVrms, Output Type=Fixed, Packaging="Cut Tape (CT)", Part Status=Active, Pricing 1="1=3.41, 10=3.213, 25=2.5704, 50=2.4418, 100=2.2491, 250=2.13344, 500=2.05634 (USD)", Reference Type=Series, RoHS="RoHS Compliant", Stock 1=2623, Supplier 1=Digi-Key, Supplier Device Package=SOT-23-6
U2: library part CMP-0793-00166-1, "4.5 Ohm Ron, 16-Channel, +/-5 V,+12 V,+5 V and +3.3 V Multiplexer, 28-pin SOP (RU-28), Reel", Manufacturer="Analog Devices", Bandwidth (Hz)="21M, 22M, 19M, 17M", Code_JEDEC=MO-153-AE, ComponentLink1Description="Manufacturer URL", ComponentLink1URL=http://www.analog.com/en/index.html, ComponentLink2Description=Datasheet, ComponentLink2URL=http://www.analog.com/static/imported-files/data_sheets/ADG1606_1607.pdf, ComponentLink3Description="Package Specification", ComponentLink3URL=http://www.analog.com/static/imported-files/packages/249854663RU_28.pdf, DatasheetVersion="Rev. 0", Max Analog Signal Range="Vss to Vdd", Mounting Technology="Surface Mount", PackageDescription="28-Pin Thin Shrink Small Outline Package, Body 9.7 x 4.4 mm, Pitch 0.65 mm", PackageReference=RU-28, PackageVersion=Mar-05, Packing=Reel, PartNumber=ADG1606BRUZ-REEL7, Ron (ohms)=4, t transition (s)=143n
U3: library part CMP-0249-00017-1, "16-Bit, +5V, 200ksps ADC with 10uA Shutdown, 10-Pin uMAX, -40°C to +85°C, Pb-Free, Tape and Reel", Code_JEDEC=MO-187-BA, ComponentLink1Description="Manufacturer URL", ComponentLink1URL=http://www.maxim-ic.com, ComponentLink2Description=Datasheet, ComponentLink2URL=http://datasheets.maxim-ic.com/en/ds/MAX11100.pdf, ComponentLink3Description="Package Specification", ComponentLink3URL=http://pdfserv.maxim-ic.com/package_dwgs/21-0061.PDF, DatasheetVersion="Rev 1, Jan-2012", PackageDescription="10-Pin Micro-MAX Thin Shrink Small Outline (uSOP), 3 x 3 x 0.85 mm Body, 0.5 mm Pitch, Pb-Free", PackageReference=U10+2, PackageVersion="revL, 2008"
U4: library part CMP-0055-00867-3, "Low Power CMOS Dual Operational Amplifier, 8-pin Narrow SOIC", Manufacturer="Texas Instruments", Package Reference=D0008A, PackageTopMarking=NSZXTT*LPC66*2AIM, PowerWise=N, Code_IPC=SOIC127P600-8, Code_JEDEC=MS-012-AA, ComponentLink1Description="Datasheet URL", ComponentLink1URL=http://www.ti.com/general/docs/lit/getliterature.tsp?genericPartNumber=LPC662&fileType=pdf, CompType=Amplifiers, PackageDescription="SOIC Narrow, 4.9 x 3.9 x 1.45mm, 8 Lead, 1.27mm Pitch", PartId=1, PinCount=8, RoHS=N
U5 U7: "Single Axix CMOS Signal Conditioning Module", Manufacturer=Spectron, Manufacturer Part Number=A40012
U6: library part CMP-0055-00867-3, "Low Power CMOS Dual Operational Amplifier, 8-pin Narrow SOIC", Base Part Number=LPC662, Current - Supply=86µA, Manufacturer="Texas Instruments", Manufacturer Part Number=LPC662AIMX/NOPB, Operating Temperature="-40°C ~ 85°C", Package / Case="8-SOIC (0.154\", 3.90mm Width)", Supplier Device Package=8-SOIC, Supplier Part Number 1=296-35456-1-ND, Voltage - Supply, Single/Dual (±)="4.75 V ~ 15.5 V, ±2.38 V ~ 7.75 V", Amplifier Type="General Purpose", Category="Integrated Circuits (ICs)", ComponentLink1Description=http://www.ti.com/lit/ds/symlink/lpc662.pdf, ComponentLink1URL=http://www.ti.com/lit/ds/symlink/lpc662.pdf, Mounting Type="Surface Mount", Output Type=Rail-to-Rail, Packaging="Cut Tape (CT)", Part Status=Active, Pricing 1="1=2.98, 10=2.672, 100=2.1893, 500=1.86368, 1000=1.57178 (USD)", RoHS="RoHS Compliant", Slew Rate="0.11 V/µs", Stock 1=4976, Supplier 1=Digi-Key

## Via types
v1: diameter 1.27, hole 0.711, Top Layer to Bottom Layer, 66 vias
v2: diameter 0.75, hole 0.5, Top Layer to Bottom Layer, 10 vias
v3: diameter 0.711, hole 0.711, Top Layer to Bottom Layer, 9 vias

## Nets (pads, with @x,y where several pads share a name; then routed paths per layer and width w, separated by ;. In a path a pad name is that pad's centre, name@x,y a point inside that pad or via, vN(x,y) a via of type N, cw(c..) or ccw(c..) an arc to the next point about the centre after c; other vN are vias at no path point)
+3.3: C5.1 P14.20 U3.3 | length 52.3
  Top Layer w0.254: U3.3 v2(28.984,129.736)
  Bottom Layer w0.254: C5.1 28.968,128.82 28.968,129.72 29.065,129.817 29.065,130.492 32.552,133.979 33.937,133.979 38.595,138.637 38.595,148.234 42.278,151.917 42.278,171.486 43.417,172.624 P14.20@43.458,172.624
+5: C3.1 C4.1 C7.1 C12.1 P14.19 R3.2 R6.2 R11.2 R14.2 R15.2 R18.2 R19.2 R20.2 U1.3 U1.4 U2.1 U2.18 U3.7 U4.8 U5.7 U6.8 U7.7 | length 33.7
  Top Layer w0.254: R15.2 12.888,110.556 v1(12.954,110.49) ; R3.2 14.231,128.184 v1(14.313,128.102) ; R6.2 14.624,138.434 v1(14.643,138.415) ; R11.2 12.812,148.448 v1(14.389,148.448) ; R20.2 14.416,158.434 v1(14.478,158.496) ; R18.2 v1(14.986,102.87) ; R14.2 13.203,117.917 13.264,117.856 v1(14.732,117.856) ; R19.2 v1(15.24,92.964) ; v2(24.321,144.308) 25.047,143.582 U2.18@27.909,143.582 ; U1.3 U1.4 C4.1@31.543,123.495 ; C3.1 30.105,123.316 31.564,123.316 C4.1 ; U3.7 31.395,129.238 33,129.238 v2(33.033,129.271) ; v1(33.559,134.891) U2.1@33.559,137.082
  Bottom Layer w0.254: C7.1@25.616,49.216 25.632,49.201 27.048,49.201 v1(27.064,49.185) 28.492,49.185 U6.8 ; C12.1 27.522,15.124 v1(27.572,15.174) 28.947,15.174 U4.8
  other v2: 30.176,124.686
+12: DS1.1 DS2.1 DS3.1 DS4.1 DS5.1 DS6.1 P3.1 P5.1 P6.1 P8.1 P9.1 P11.1 P14.21 P14.22 | length 151.6
  Top Layer w0.5: P14.22@45.998,172.624 46.088,172.534 46.088,169.454 49.851,165.691 61.722,165.691 65.024,162.389 65.024,149.943 ; DS6.1 58.91,98.484 59.847,97.547 P11.1 65.024,102.373 65.024,109.303 ; DS5.1@55.098,107.984 55.263,107.819 60.033,107.819 P9.1 63.376,107.654 65.024,109.303 ; DS1.1@55.098,128.984 59.467,128.984 59.997,128.454 63.602,128.454 65.024,129.877 ; DS3.1@55.098,139.484 59.028,139.484 60.192,138.321 64.325,138.321 65.024,139.021 ; DS4.1@55.098,149.984 58.633,149.984 P6.1 63.5,148.419 65.024,149.943 ; DS2.1@55.298,119.284 59.018,119.284 P8.1 63.77,117.954 65.024,119.209 ; 65.024,109.303 65.024,119.209 ; 65.024,119.209 65.024,129.877 ; 65.024,129.877 65.024,139.021 ; 65.024,139.021 65.024,149.943
-5: P14.3 U4.4 U6.4 | length 170.4
  Bottom Layer w0.254: 22.525,63.782 24.356,63.782 32.322,55.816 U6.4 ; P14.3@23.138,170.084 22.492,169.438 22.492,29.855 26.156,26.191 30.22,26.191 32.893,23.518 U4.4
"ADC REF": C2.2 U1.5 U1.6 U3.6 | length 4.8
  Top Layer w0.254: U3.6 31.393,126.736 U1.6 U1.5 31.572,125.607 33.097,125.607 C2.2
Analog_Mux_Out: U2.28 U3.5 | length 11.5
  Top Layer w0.254: U3.5 26.1,128.736 25.26,129.576 25.26,135.283 27.059,137.082 U2.28@27.909,137.082
"Arrestment Heater FET": P14.16 R9.1 | length 26.8
  Top Layer w0.254: P14.16@38.378,172.624 38.6,172.624 39.738,171.486 39.738,152.169 43.573,148.334 R9.1
"Arrestment Htr Out": P6.2 Q3.4 R8.1 | length 18
  Top Layer w0.254: R8.1 55.323,144.834 56.368,145.879 P6.2
  Bottom Layer w0.254: Q3.4@48.298,147.356 Q3.4@49.775,145.879
  Bottom Layer w0.5: Q3.4@49.775,145.879 P6.2
  other v1: 47.866,145.578 49.898,145.578 51.93,145.578 47.866,147.356 49.898,147.356 51.93,147.356 47.866,149.134 49.898,149.134 51.93,149.134
"Arrestment Htr_LED": DS4.2 R8.2 | length 1.8
  Top Layer w0.254: R8.2 DS4.2@55.098,148.384
"Arrestment Thermistor": P7.1 R11.1 U2.20 | length 23.9
  Top Layer w0.254: P7.1@6.695,148.434 R11.1 17.051,142.282 U2.20@27.909,142.282
  Bottom Layer w0.254: P7.1 P7.1@6.695,148.434
"Board1 Heater FET": P14.17 R16.1 | length 68.2
  Top Layer w0.254: v1(38.468,104.43) R16.1
  Signal Layer 1 w0.254: v1(38.468,104.43) 41.008,106.97 41.008,169.994 P14.17@40.918,170.084
"Board1 Htr Out": P9.2 Q5.4 R12.1 | length 16.9
  Top Layer w0.254: R12.1 55.323,103.334 57.103,105.114 P9.2
  Bottom Layer w0.254: Q5.4@49.698,106.591 Q5.4@51.175,105.114
  Bottom Layer w0.5: Q5.4@51.175,105.114 P9.2
  other v1: 47.866,105.192 49.898,105.192 51.93,105.192 47.866,106.97 49.898,106.97 51.93,106.97 47.866,108.748 49.898,108.748 51.93,108.748
"Board1 Thermistor": P12.1 R18.1 U2.25 | length 48.3
  Top Layer w0.254: P12.1 6.628,102.684 R18.1@10.898,102.684 ; 11.176,105.493 11.242,105.427 11.242,105.305 ; R18.1@11.242,102.699 11.242,105.305 ; U2.25@27.909,139.032 27.059,139.032 19.916,131.889 19.916,113.979 19.05,113.113 11.242,105.305
  Bottom Layer w0.254: P12.1 P12.1@6.628,102.684
"Board1_Htr LED": DS5.2 R12.2 | length 1.4
  Top Layer w0.254: R12.2 55.118,105.054 DS5.2
"Board2 Heater FET": P14.18 R17.1 | length 82
  Top Layer w0.254: v1(37.706,94.27) R17.1
  Signal Layer 1 w0.254: v1(37.706,94.27) 37.556,94.42 37.556,131.812 39.738,133.994 39.738,171.486 40.877,172.624 P14.18@40.918,172.624
"Board2 Htr Out": P11.2 Q6.4 R13.1 | length 16.5
  Top Layer w0.254: R13.1 55.323,93.834 56.496,95.007 P11.2
  Bottom Layer w0.254: Q6.4 Q6.4@51.375,95.007
  Bottom Layer w0.5: Q6.4@51.375,95.007 P11.2
  other v3: 47.866,95.032 49.898,95.032 51.93,95.032 47.866,96.81 49.898,96.81 51.93,96.81 47.866,98.588 49.898,98.588 51.93,98.588
"Board2 Thermistor": P13.1 R19.1 U2.26 | length 59.1
  Top Layer w0.254: P13.1 11.204,92.754 11.242,92.793 11.242,96.669 12.7,98.127 15.24,98.127 20.32,103.207 20.32,131.643 27.059,138.382 U2.26@27.909,138.382
"Board2_Htr LED": DS6.2 R13.2 | length 1.4
  Top Layer w0.254: R13.2 DS6.2
"Conning Tower Heater FET": P14.14 R4.1 | length 47.7
  Top Layer w0.254: P14.14@35.838,172.624 36.06,172.624 37.291,171.393 37.291,134.716 43.573,128.434 R4.1
"Conning Tower Htr Out": P5.2 Q1.4 R1.1 | length 15.6
  Top Layer w0.254: R1.1 55.323,124.334 56.903,125.914 P5.2
  Bottom Layer w0.5: Q1.4@50.606,125.914 P5.2
  other v1: 47.866,125.544 49.898,125.544 51.93,125.544 47.866,127.322 49.898,127.322 51.93,127.322 47.866,129.1 49.898,129.1 51.93,129.1
"Conning Tower Htr_LED": DS1.2 R1.2 | length 1.4
  Top Layer w0.254: R1.2 DS1.2@55.098,127.384
"Conning Tower Thermistor": P2.1 R3.1 U2.22 | length 26.5
  Top Layer w0.254: P2.1 R3.1@10.778,128.304 ; R3.1 23.696,140.982 U2.22@27.909,140.982
Cross_Black: P1.3 U7.25 | length 111.6
  Top Layer w0.254: P1.3 8.138,167.507 5.412,164.78 5.412,83.041 21.418,67.034 U7.25
Cross_Blue: P1.5 U7.24 | length 109.3
  Signal Layer 1 w0.254: P1.5 10.678,147.474 11.406,146.746 11.406,128.89 23.979,116.317 23.979,66.405 U7.24
Cross_Raw: R45.1 TP5.1 U7.19 | length 9
  Bottom Layer w0.254: R45.1@36.658,63.411 U7.19 ; R45.1@36.897,63.246 40.663,63.246 TP5.1
Cross_Yellow: C11.2 P1.1 U7.27 | length 111.6
  Signal Layer 1 w0.254: P1.1 5.412,169.998 5.412,83.856 16.338,72.929 U7.27
  Bottom Layer w0.254: C11.2@15.386,63.583 15.386,64.782 16.338,65.734 U7.27
"Gearbox Heater FET": P14.15 R10.1 | length 34.1
  Top Layer w0.254: P14.15@38.378,170.084 38.468,169.994 38.468,143.439 43.573,138.334 R10.1
"Gearbox Htr Out": P3.2 Q4.4 R7.1 | length 15.2
  Top Layer w0.254: R7.1 55.396,135.132 59.131,135.132 59.78,135.781 P3.2
  Bottom Layer w0.5: Q4.4@50.456,135.781 P3.2
  other v1: 47.866,135.561 49.898,135.561 51.93,135.561 47.866,137.339 49.898,137.339 51.93,137.339 47.866,139.117 49.898,139.117 51.93,139.117
"Gearbox Htr_LED": DS3.2 R7.2 | length 1.4
  Top Layer w0.254: R7.2 DS3.2@55.098,137.884
"Gearbox Thermistor": P4.1 R6.1 U2.21 | length 23.6
  Top Layer w0.254: P4.1 R6.1@10.785,138.321 ; R6.1 10.898,140.267 12.263,141.632 U2.21@27.909,141.632
GND: C1.2 C2.1 C3.2 C4.2 C5.2 C7.2 C10.2 C12.2 C13.2 P2.2 P4.2 P7.2 P10.2 P10.4 P12.2 P13.2 P14.1 P14.2 P14.23 P14.24 P15.2 Q1.3 Q2.3 Q3.3 Q4.3 Q5.3 Q6.3 R33.1 R47.1 U1.2 U2.12 U2.27 U3.2 U3.4 U3.8 U5.22 U7.22
"Lid Thermistor": P15.1 R20.1 U2.19 | length 30.2
  Top Layer w0.254: P15.1 6.678,158.434 R20.1 10.898,154.428 22.395,142.932 U2.19@27.909,142.932
  Bottom Layer w0.254: P15.1 P15.1@6.678,158.434
Long_Black: P1.4 U5.25 | length 147
  Signal Layer 1 w0.254: P1.4 7.088,171.674 7.088,166.609 7.139,166.558 7.139,160.411 7.8,159.751 7.8,140.32 7.988,140.131 7.988,95.122 17.35,85.761 17.35,36.603 21.293,32.659 U5.25
Long_Blue: P1.6 U5.24 | length 147.3
  Signal Layer 1 w0.254: P1.6 9.512,171.558 9.512,159.435 9.258,159.181 9.258,128.052 20.18,117.13 20.18,36.312 23.833,32.659 U5.24
Long_Raw: R28.1 TP1.1 U5.19 | length 11.8
  Bottom Layer w0.254: R28.1@36.533,28.234 U5.19 ; R28.1 38.939,28.546 40.577,26.909 TP1.1
Long_Yellow: C6.2 P1.2 U5.27 | length 149.2
  Signal Layer 1 w0.254: P1.2 4.548,171.674 4.548,81.57 10.29,75.828 10.29,38.582 16.213,32.659 U5.27
  Bottom Layer w0.254: C6.2@15.748,28.984 16.002,29.238 16.002,31.148 16.213,31.359 U5.27
"Meter Heater FET": P14.13 R5.1 | length 55.6
  Top Layer w0.254: P14.13@35.838,170.084 35.928,169.994 35.928,125.579 43.573,117.934 R5.1
"Meter Thermistor 1": P10.3 R15.1 U2.24 | length 40.5
  Top Layer w0.254: P10.3 R15.1@10.678,112.714 ; R15.1@10.898,112.934 10.898,114.359 11.43,114.891 15.069,114.891 18.034,117.856 18.034,130.657 27.059,139.682 U2.24@27.909,139.682
"Meter Thermistor 2": P10.1 R14.1 U2.23 | length 35.6
  Top Layer w0.254: P10.1 R14.1@10.758,117.794 ; R14.1@10.898,117.934 10.898,120.709 16.764,126.575 16.764,132.671 24.425,140.332 U2.23@27.909,140.332
Meter_Htr_LED: DS2.2 R2.2 | length 1.8
  Top Layer w0.254: R2.2 DS2.2@55.298,117.684
METER_HTR_OUT: P8.2 Q2.4 R2.1 | length 15.5
  Top Layer w0.254: R2.1 55.523,114.234 56.703,115.414 P8.2
  Bottom Layer w0.5: Q2.4@50.396,115.414 P8.2
  other v1: 47.866,115.034 49.898,115.034 51.93,115.034 47.866,116.812 49.898,116.812 51.93,116.812 47.866,118.59 49.898,118.59 51.93,118.59
"MUX A2": P14.7 U2.15 | length 24.7
  Top Layer w0.254: U2.15@27.909,145.532 27.953,145.575 v2(27.953,146.67)
  Signal Layer 1 w0.254: v2(27.953,146.67) 28.048,146.765 28.048,169.914 P14.7@28.218,170.084
"MUX A3": P14.11 U2.14 | length 24.7